# Altium PCB Power_Supply_Board.PcbDoc (part 2 of 2)
Units mm, origin at the board's own origin, x right, y up, seen from the top; angles counter-clockwise.
Board outline 32 x 28 mm, 4 copper layers (Top Layer, IN_T, IN_B, Bottom Layer), stack 1.57 mm thick; 32 components, 16 nets, 98 pads, 34 vias.
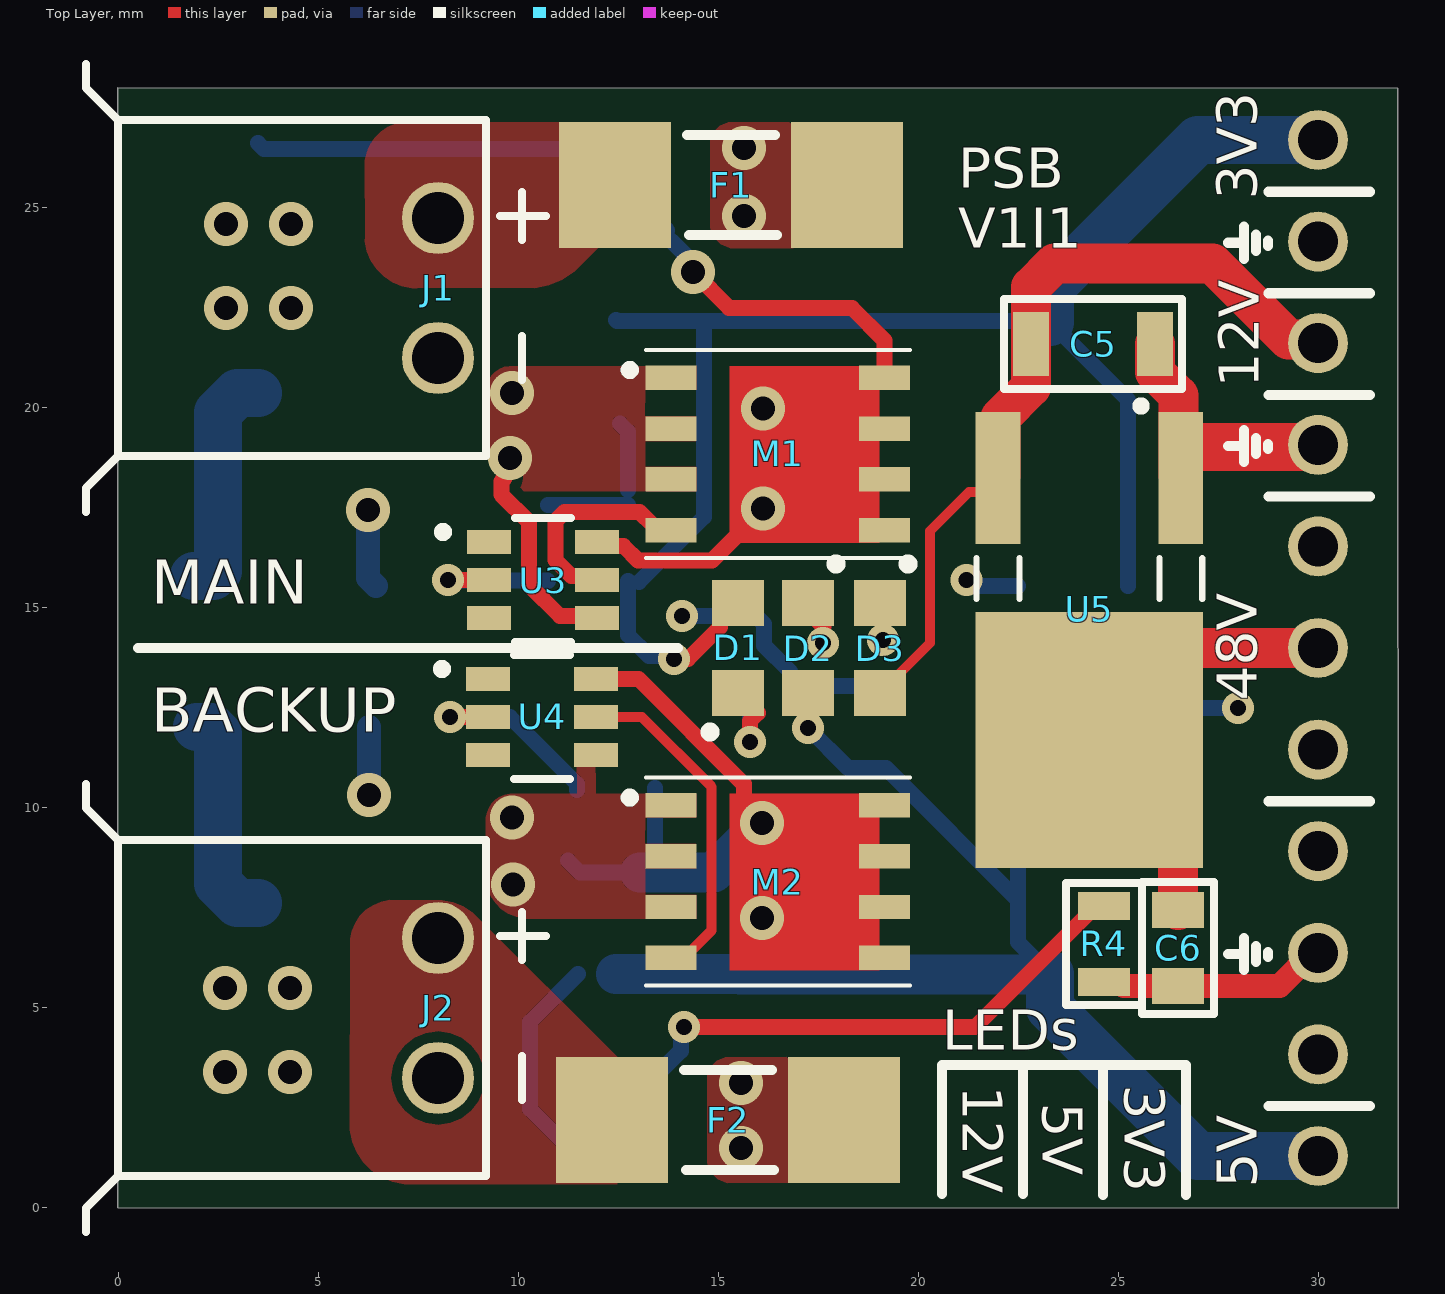
[diagram p0: Top Layer view]

## Polygon pours and split planes (outlines as drawn)
+48_MAIN on Top Layer "+48_MAIN_L01_P000" (solid, pour order 0): 14.45,19.175 13.175,19.175 13.175,18.525 14.45,18.525 14.45,17.925 10.125,17.925 cw(c10.125,18.85) 9.2,18.85 9.2,20.4 cw(c9.85,20.4) 9.85,21.05 14.45,21.05 14.45,20.45 13.175,20.45 13.175,19.8 14.45,19.8
NetF1_1 on Top Layer "Top Layer-NetF1_1" (solid, pour order 12): 12,27.15 12,24 11.543,23.543 cw(c10.232,24.854) 10.232,23 7.475,23 cw(c7.475,24.3) 6.175,24.3 6.175,26.075 cw(c7.25,26.075) 7.25,27.15
NetF2_1 on Top Layer "Top Layer-NetF2_1" (solid, pour order 10): 12.475,3.775 8.962,7.288 ccw(c7.967,6.293) 7.967,7.7 6.9,7.7 ccw(c6.9,6.6) 5.8,6.6 5.8,2.1 ccw(c7.3,2.1) 7.3,0.6 12.475,0.6
+48_BACKUP on Top Layer "+48_BACKUP_L01_P001" (solid, pour order 1): 11.475,10.36 11.475,11.4 11.937,11.4 11.937,10.36 14.45,10.36 14.45,9.76 13.175,9.76 13.175,9.11 14.45,9.11 14.45,8.485 13.175,8.485 13.175,7.835 14.45,7.835 14.45,7.235 10.265,7.235 cw(c10.265,8.3) 9.2,8.3 9.2,9.7 cw(c9.86,9.7) 9.86,10.36
+48_MAIN on Top Layer "+48_MAIN_L01_P003" (solid, pour order 3): 16.875,27.15 15.375,27.15 ccw(c15.375,26.575) 14.8,26.575 14.8,24.625 ccw(c15.425,24.625) 15.425,24 16.875,24
+48_BACKUP on Top Layer "+48_BACKUP_L01_P002" (solid, pour order 2): 16.8,3.775 15.3,3.775 ccw(c15.3,3.2) 14.725,3.2 14.725,1.25 ccw(c15.35,1.25) 15.35,0.625 16.8,0.625
GND on Bottom Layer "GND_L04_P008" (solid, pour order 8): 1.9,25.6 1.9,24 5.1,24 5.1,25.6
+48_MAIN on Bottom Layer "+48_MAIN_L04_P007" (solid, pour order 7): 5.1,21.4 5.1,23 1.9,23 1.9,21.4
GND on Bottom Layer "GND_L04_P006" (solid, pour order 6): 5.1,2.4 5.1,4 1.9,4 1.9,2.4
+48_BACKUP on Bottom Layer "+48_BACKUP_L04_P005" (solid, pour order 5): 1.9,6.6 1.9,5 5.1,5 5.1,6.6
GND on IN_T (split plane): 31.49,27.49 31.49,0.51 0.51,0.51 0.51,13.699 26,13.699 26.059,13.704 26.115,13.721 26.167,13.749 26.213,13.787 26.251,13.833 26.279,13.885 26.296,13.941 26.301,14 26.296,14.059 26.279,14.115 26.251,14.167 26.213,14.213 26.167,14.251 26.115,14.279 26.059,14.296 26,14.301 0.51,14.301 0.51,27.49
+48_BACKUP on IN_B (split plane): 14.524,5.85 14.529,5.791 14.546,5.735 14.574,5.683 14.612,5.637 14.658,5.599 14.71,5.571 14.766,5.554 14.825,5.549 18.724,5.549 18.724,0.51 0.51,0.51 0.51,13.699 14.524,13.699
+48_MAIN on IN_B (split plane): 18.724,27.49 18.724,22.451 14.825,22.451 14.766,22.446 14.71,22.429 14.658,22.401 14.612,22.363 14.574,22.317 14.546,22.265 14.529,22.209 14.524,22.15 14.524,14.301 0.51,14.301 0.51,27.49
+5V on IN_B (split plane): 31.49,0.51 19.326,0.51 19.326,9.949 31.49,9.949
+3V3 on IN_B (split plane): 31.49,27.49 31.49,18.051 19.326,18.051 19.326,27.49
+48_PROT on IN_B (split plane): 18.724,17.75 18.729,17.691 18.746,17.635 18.774,17.583 18.812,17.537 18.858,17.499 18.91,17.471 18.966,17.454 19.025,17.449 31.49,17.449 31.49,10.551 19.025,10.551 18.966,10.546 18.91,10.529 18.858,10.501 18.812,10.463 18.774,10.417 18.746,10.365 18.729,10.309 18.724,10.25 18.724,6.151 15.126,6.151 15.126,21.849 18.724,21.849

## Other copper
IN_T (plane layer: these items are gaps in the copper):
  lines w0.254: 9.267,14 26,14
  lines w0.6: 0,14 26,14
IN_B (plane layer: these items are gaps in the copper):
  lines w0.254: 19.025,17.725 19.025,17.75
  lines w0.6: -0.25,14 14.725,14 ; 14.825,0.2 14.925,0.1 15.75,0.1 ; 19.025,0.025 19.025,10.25 32,10.25 ; 19.025,5.85 14.825,5.85 14.825,22.15 19.025,22.15 ; 19.025,27.975 19.025,17.75 32,17.75

## Silkscreen, mask and mechanical layers (free items; w line width, h text height)
Top Overlay:
  lines w0.254: 0.5,14 14,14 ; 20.6,0.35 20.6,3.575 26.7,3.575 26.7,0.325 ; 22.625,0.35 22.625,3.55 ; 24.627,0.327 24.627,3.55 ; 27.75,6.35 28.05,6.35 ; 27.75,19.05 28.05,19.05 ; 27.75,24.13 28.05,24.13 ; 28.15,5.95 28.15,6.75 ; 28.15,18.65 28.15,19.45 ; 28.15,23.73 28.15,24.53 ; 28.45,6.15 28.45,6.55 ; 28.45,18.85 28.45,19.25 ; 28.45,23.93 28.45,24.33 ; 28.75,6.275 28.75,6.4 ; 28.75,18.975 28.75,19.1 ; 28.75,24.055 28.75,24.18 ; 28.76,2.548 31.3,2.548 ; 28.76,10.168 31.3,10.168 ; 28.76,17.788 31.3,17.788 ; 28.76,20.328 31.3,20.328 ; 28.76,22.868 31.3,22.868 ; 28.76,25.408 31.3,25.408
  text "3V3" at 28.475,25.2 h1 r90
  text "PSB / V1I1" at 21,24 h1
  text "12V" at 28.525,20.5 h1 r90
  text "MAIN" at 0.825,15.1 h1.1
  text "48V" at 28.475,12.68 h1 r90
  text "BACKUP" at 0.825,11.9 h1.1
  text "LEDs" at 20.6,3.95 h1
  text "3V3" at 25.175,3.075 h1 r270
  text "12V" at 21.125,3.05 h1 r270
  text "5V" at 23.125,2.625 h1 r270
  text "5V" at 28.475,0.5 h1 r90
OUTLINE:
  the board outline again, w0.254

## Dimensions
0,28 to 32,28 on DIMENSIONS
0,0 to 0,28 on DIMENSIONS